# Altium PCB omnibothub-power-four.PcbDoc
Units mil, origin at the board's own origin, x right, y up, seen from the top; angles counter-clockwise.
Board outline 2530.03 x 2710.03 mil, 2 copper layers (Top Layer, Bottom Layer); 15 components, 6 nets, 36 pads, 4 vias.
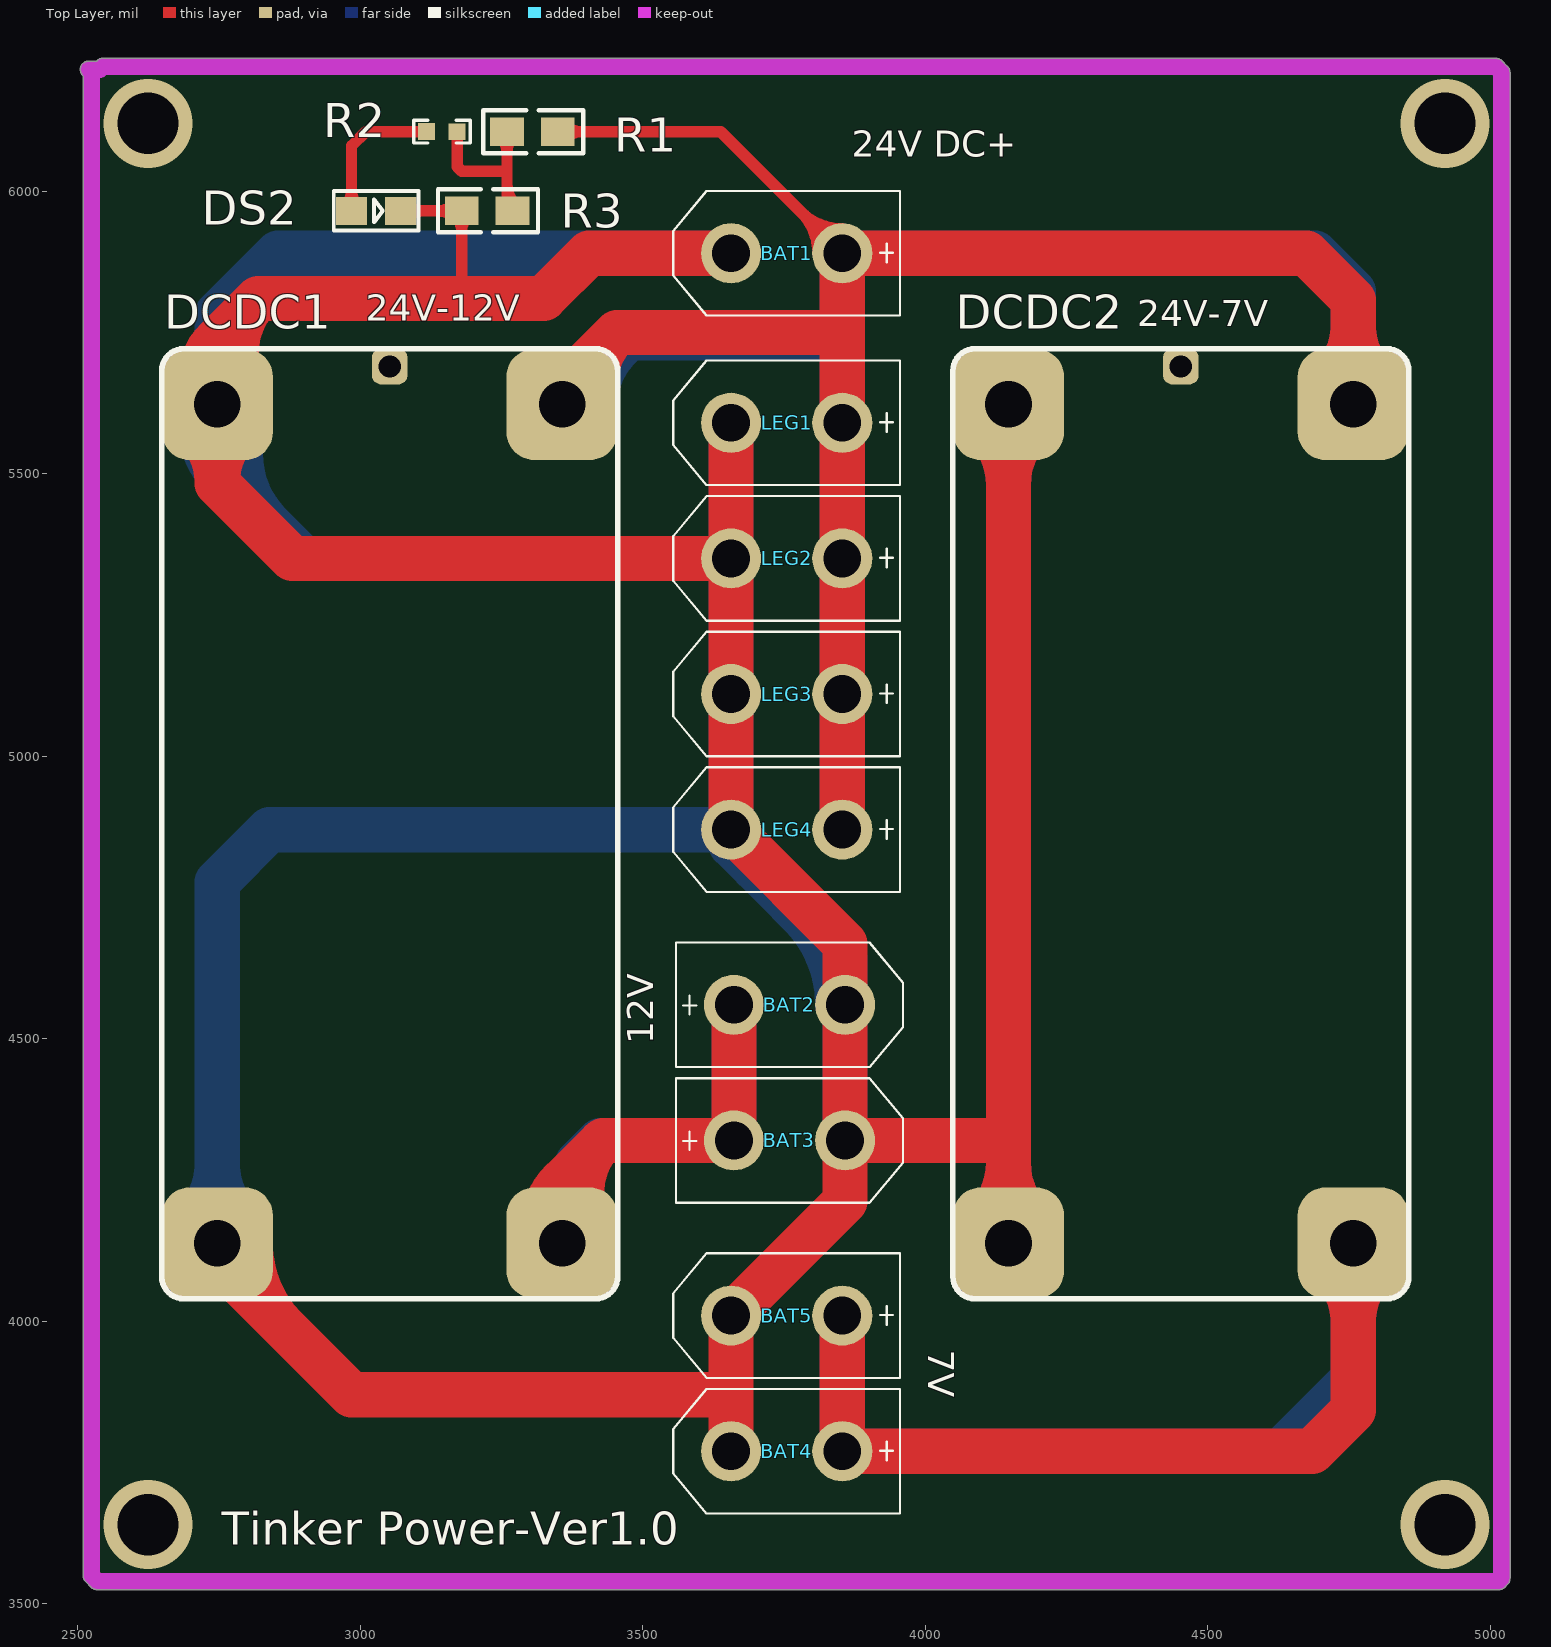
[diagram p0: Top Layer view]
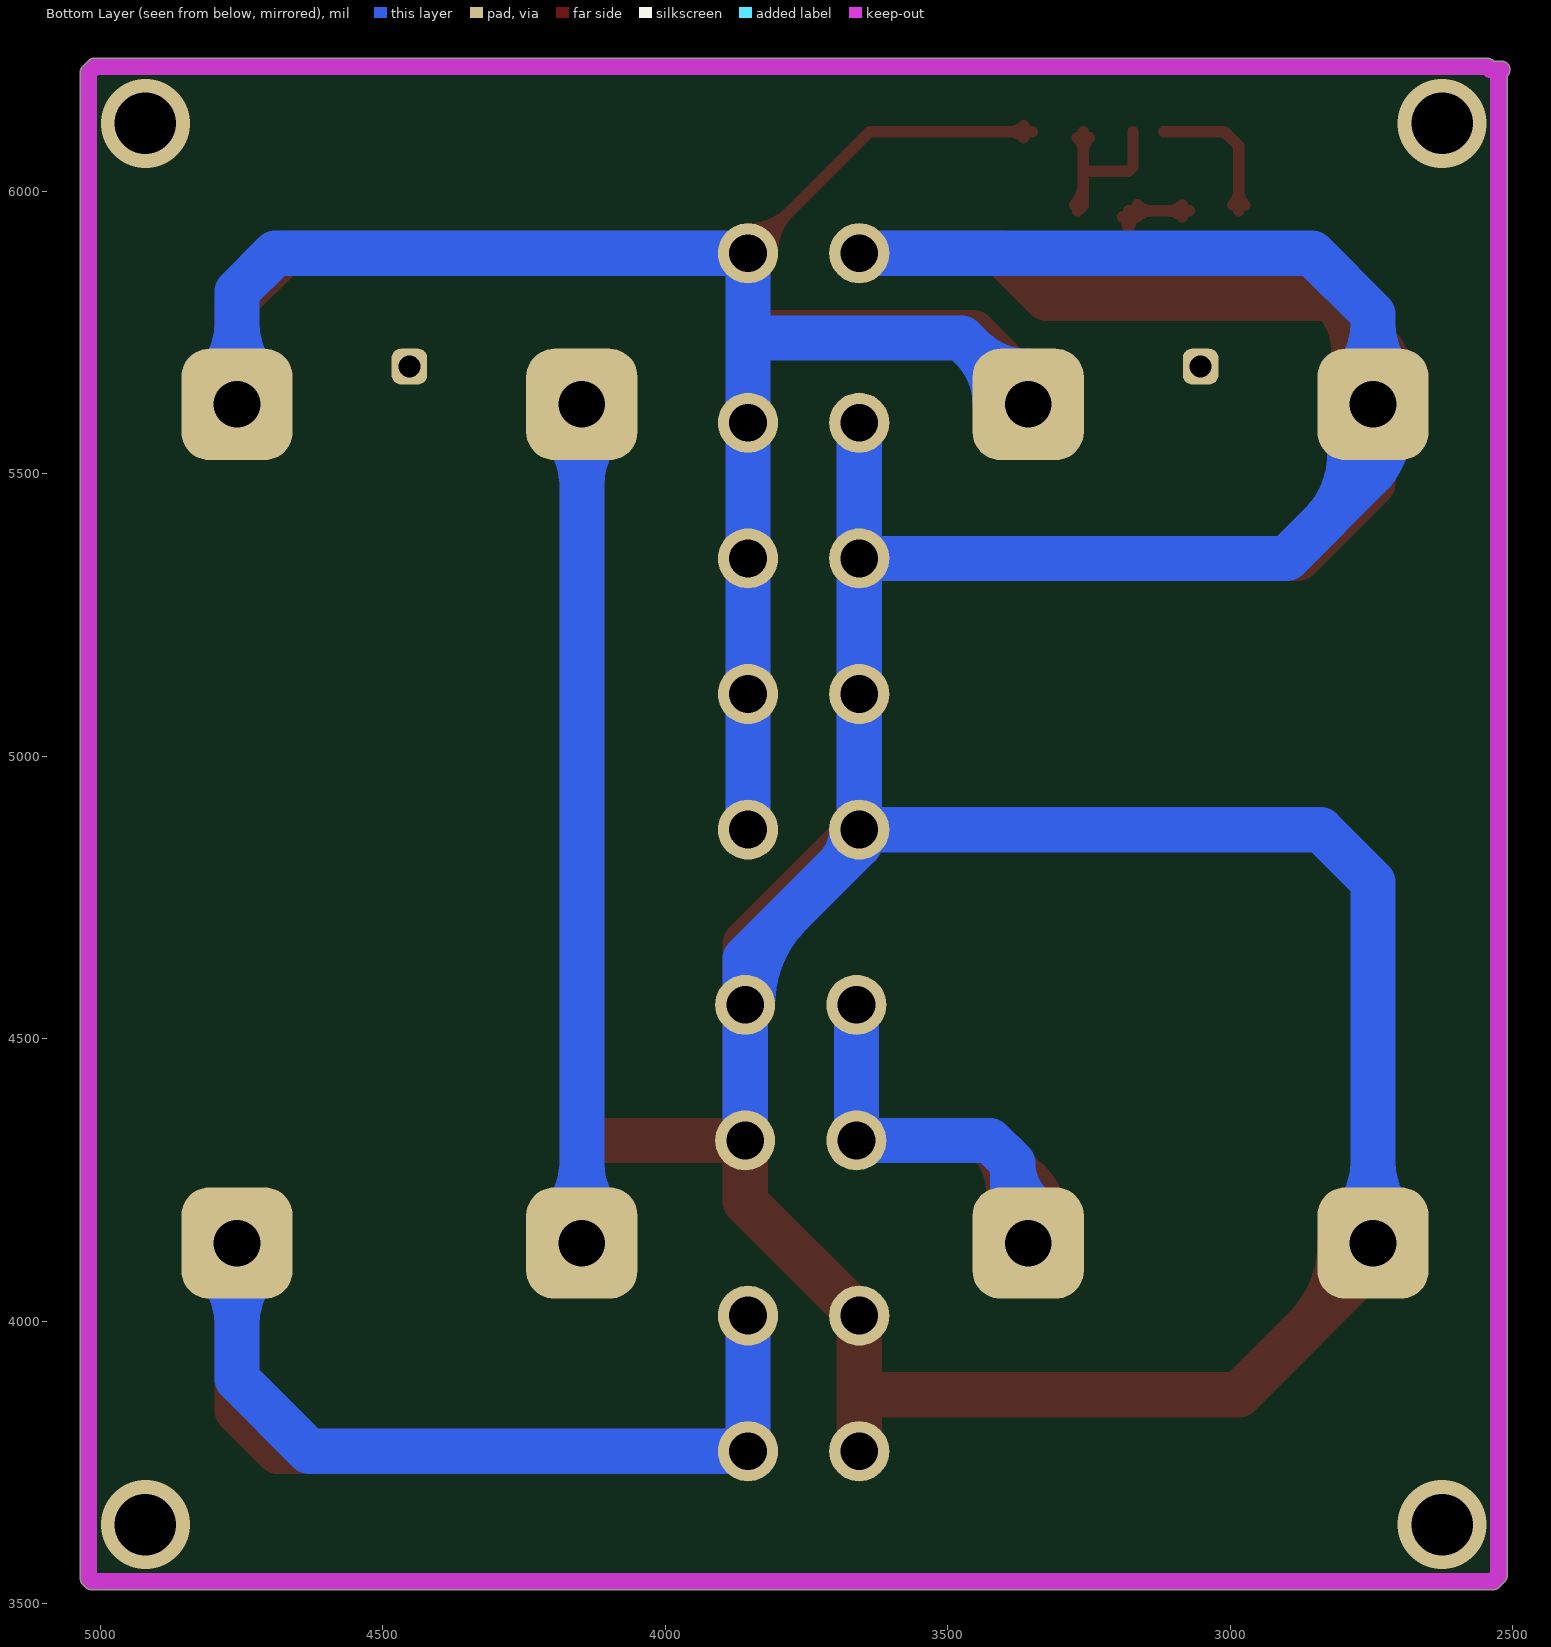
[diagram p1: Bottom Layer view, seen from below]
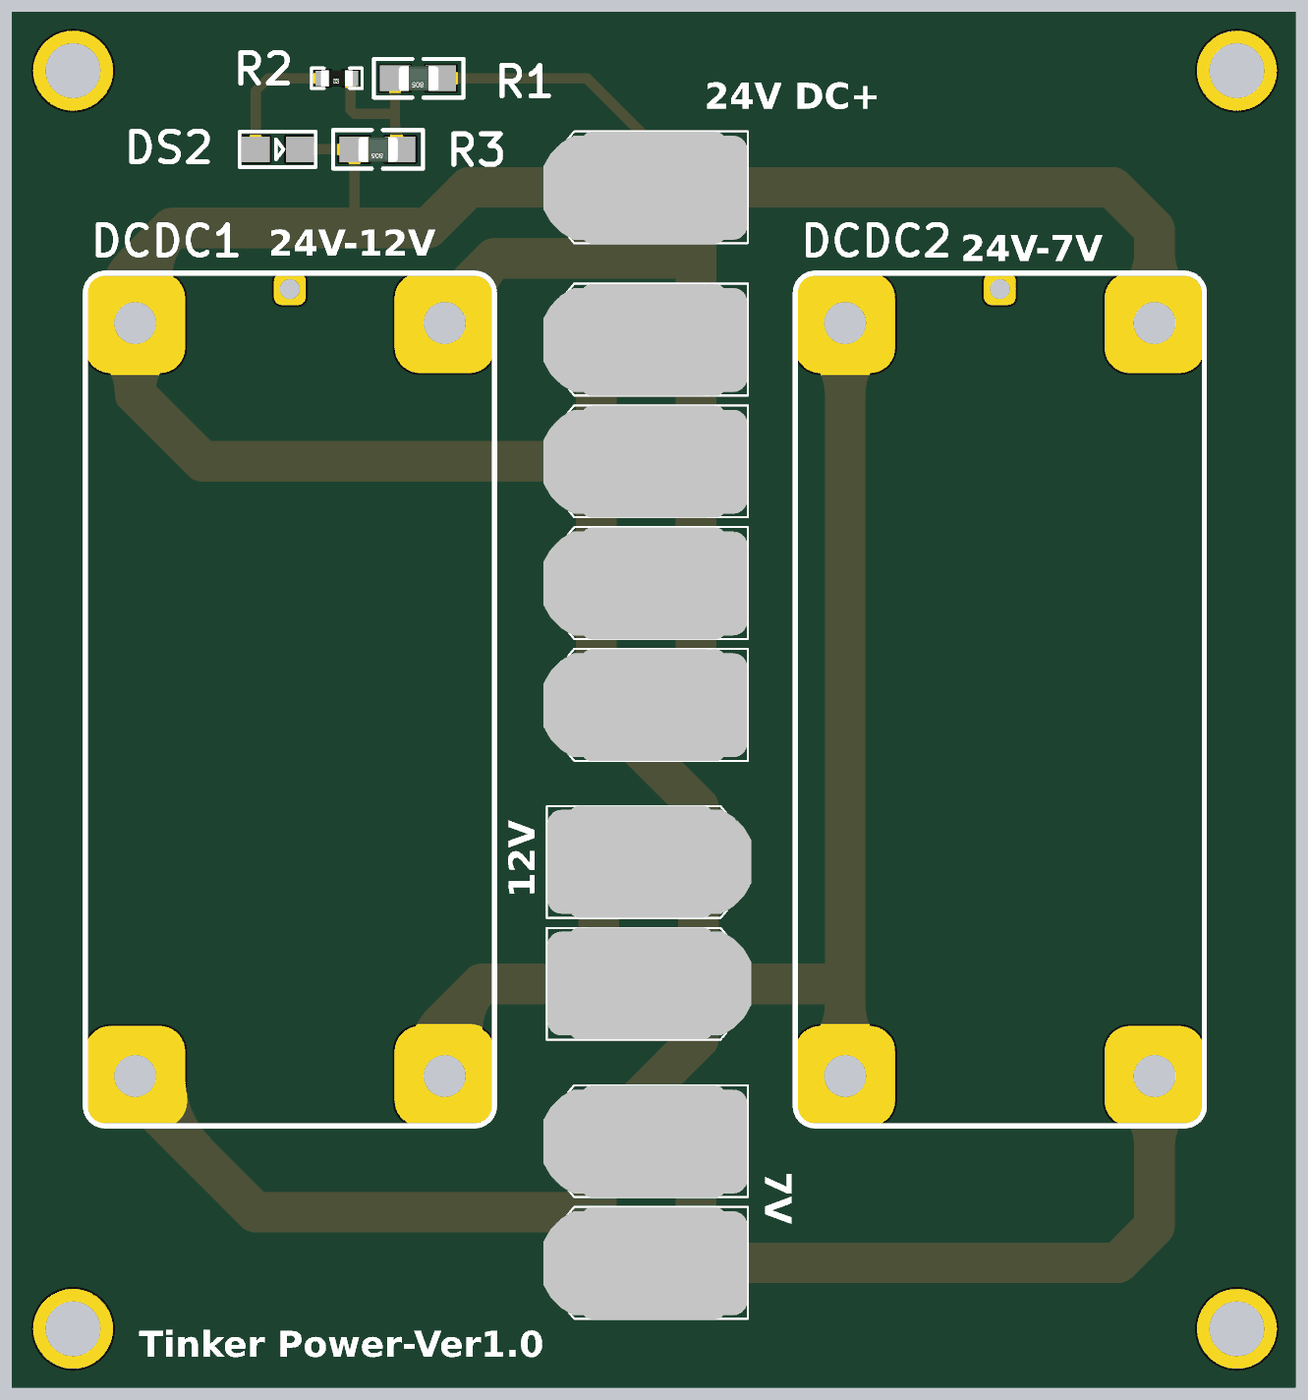
[diagram p2: 3D render of the assembled board from above, using the file's embedded part models]

## Layer stack, top to bottom
Top Layer: signal copper 1.4
Dielectric: dielectric 12.6, FR-4, Dk 4.8
Bottom Layer: signal copper 1.4

## Board outline
2514.4,3539.37 cw(c2525,3550) 2509.99,3550 2509.99,6203.81 cw(c2520,6215) 2520,6230.02 2533.78,6230.02 2534.38,6230.62 2534.37,6230.6 cw(c2545,6220) 2545,6235.02 5010,6235.02 cw(c5010,6220) 5020.63,6230.6 5020.62,6230.62 5030.62,6220.62 5030.6,6220.63 cw(c5020,6210) 5035.02,6210 5035.02,3545 cw(c5020,3545) 5030.6,3534.37 5030.62,3534.38 5025.62,3529.38 5025.63,3529.4 cw(c5015,3540) 5015,3524.99 2535,3524.99 cw(c2535,3540) 2524.37,3529.4 2524.38,3529.38

## Design rules (kind name [scope] priority, off if disabled: settings)
Clearance [All] p1: gap=10
PolygonConnect [All] p1: connectstyle=Relief reliefconductorwidth=10 reliefentries=4 polygonreliefangle="90 Angle"
RoutingVias [All] p1: holewidth=28 width=50 viastyle="Through Hole" minholewidth=28 minwidth=50 maxholewidth=28 maxwidth=50
SilkscreenOverComponentPads [All] p1: minsilkscreentomaskgap=10
SolderMaskExpansion [All] p1: expansion=4
Width [All] p1: maxlimit=80 minlimit=10 preferedwidth=10 minimp=50.000000 maximp=50.000000 favimp=50.000000
27 further rules are at their usual default settings.

## Components (designator, comment, footprint, x,y, rotation, side; value= is the part's Value field where it differs from the comment)
BAT1 "Header 2" XT30UPB 3755,5890 r180 top
BAT2 "Header 2" XT30UPB 3760,4560 r0 top
BAT3 "Header 2" XT30UPB 3760,4320 r0 top
BAT4 "Header 2" XT30UPB 3755,3770 r180 top
BAT5 "Header 2" XT30UPB 3755,4010 r180 top
DCDC1 "Header 2X2" DCDC5V 3360,5620 r270 top
DCDC2 "Header 2X2" DCDC5V 4760,5620 r270 top
DS2 "LED1" SMDLED 2985,5965 r0 top
LEG1 "Header 2" XT30UPB 3755,5590 r180 top
LEG2 "Header 2" XT30UPB 3755,5350 r180 top
LEG3 "Header 2" XT30UPB 3755,5110 r180 top
LEG4 "Header 2" XT30UPB 3755,4870 r180 top
R1 "100K" R0805 3305,6105 r180 top
R2 "560R" R0603 3145,6105 r180 top
R3 "10K" R0805 3225,5965 r180 top

## Footprints (in the part's own frame and the unit in brackets; to place one, negate y for a bottom-side part, rotate by r counter-clockwise, add the part's x,y. Pads: shape width x height; smd on the part's side, far side on the other; paste and mask are expansions set on the pad)
DCDC5V [mm]
  rrect50% 5x5 hole 2.1: 1(-0.065,-0.059) 2(37.635,-0.059) 3(-0.065,-15.559) 4(37.635,-15.559)
  rrect50% 1.6x1.6 hole 1: 2(-1.765,-7.809)
  silkscreen extent -2.57,-18.06 40.13,2.44
R0603 [mil]
  rect 30x30 smd: 1(-27,0) 2(27.5,-0.06)
  silkscreen extent -50,-20 50,20, body extent -31,-16 31,16, height 12
R0805 [mil]
  rect 60x50 smd: 1(45,0) 2(-45,0)
  silkscreen extent -90,-38 87,38, body extent -41,-24 38,25, height 31
SMDLED [mm]
  rect 1.4x1.27 smd: 1(0.001,-0.002) 2(2.211,-0.002)
  silkscreen extent -0.8,-0.89 3.01,0.89
XT30UPB [mm]
  round 2.7 hole 1.7: 1(-2.5,0) 2(2.5,0)
  silkscreen extent -5.1,-2.8 5.1,2.8, body extent -5.07,-2.78 5.13,2.82, height 10.7

## Part data
BAT1 BAT2 BAT3 BAT4 BAT5 LEG1 LEG2 LEG3 LEG4: "Header, 2-Pin"
DCDC1 DCDC2: "Header, 2-Pin, Dual row"
DS2: library part LED2, "Typical RED, GREEN, YELLOW, AMBER GaAs LED"
R1 R2 R3: library part Res2, "0603"

## Via types
v1: diameter 157.48, hole 108.27, Top Layer to Bottom Layer, 4 vias

## Nets (pads, with @x,y where several pads share a name; then routed paths per layer and width w, separated by ;. In a path a pad name is that pad's centre, name@x,y a point inside that pad or via, vN(x,y) a via of type N, cw(c..) or ccw(c..) an arc to the next point about the centre after c; other vN are vias at no path point)
7V: BAT4.1 BAT5.1 DCDC2.2@4757.66,4138.32 | length 3350.9
  Top Layer w80: BAT5.1 BAT4.1 4685,3770 4757.66,3842.66 DCDC2.2@4757.66,4138.32 ; DCDC2.2@4716.35,4097.01 cw(c4616.61,3997.27) 4757.66,3997.27 cw(c4898.71,3997.27) DCDC2.2@4798.97,4097.01
  Bottom Layer w80: BAT5.1 BAT4.1 4630,3770 4757.66,3897.66 DCDC2.2@4757.66,4138.32 ; DCDC2.2@4716.35,4097.01 cw(c4616.61,3997.27) 4757.66,3997.27 cw(c4898.71,3997.27) DCDC2.2@4798.97,4097.01
12V: BAT2.1 BAT3.1 DCDC1.2@3357.66,4138.32 | length 1916.5
  Top Layer w80: DCDC1.2@3325.19,4186.89 ccw(c3284.57,4247.66) 3357.66,4247.66 ; DCDC1.2@3338.82,4127.81 cw(c3424.61,4175.68) 3355.14,4245.14 ; DCDC1.2@3357.66,4138.32 3357.66,4247.66 ; DCDC1.2@3390.13,4186.89 cw(c3430.75,4247.66) 3357.66,4247.66 ; DCDC1.2@3408.68,4166.79 cw(c3520.7,4229.29) 3430,4320 ; BAT2.1 BAT3.1 3430,4320 ; 3357.66,4247.66 3430,4320
  Bottom Layer w80: DCDC1.2@3330.57,4190.09 ccw(c3283.53,4279.99) 3385,4279.99 ; DCDC1.2@3357.66,4138.32 3385,4165.66 3385,4280 ; BAT2.1 BAT3.1 3425,4320 3385,4280
GND: BAT1.2 BAT2.2 BAT3.2 BAT4.2 BAT5.2 DCDC1.3 DCDC1.4 DCDC2.3 DCDC2.4 DS2.2 LEG1.2 LEG2.2 LEG3.2 LEG4.2 R3.1 | length 17119.1
  Top Layer w20: DS2.2 3179.94,5964.94 R3.1 3180,5815 ; DS2.2@3085.21,5954.33 cw(c3110.81,5928.72) 3110.81,5964.94 cw(c3110.81,6001.15) DS2.2@3085.21,5975.54 ; 3138.63,5964.94 ccw(c3138.63,6001.37) R3.1@3164.39,5975.61 ; 3138.94,5964.94 cw(c3138.94,5928.94) R3.1@3164.39,5954.39 ; R3.1@3169.39,5954.39 cw(c3143.79,5928.79) 3180,5928.79 cw(c3216.21,5928.79) R3.1@3190.61,5954.39
  Top Layer w80: DCDC1.3@2706.33,5581.04 cw(c2608.92,5482.58) 2747.43,5482.58 cw(c2885.93,5482.58) DCDC1.3@2788.52,5581.04 ; DCDC1.3@2713.02,5669.8 ccw(c2663.77,5737.42) 2747.43,5737.42 ccw(c2831.09,5737.42) DCDC1.3@2781.83,5669.8 ; DCDC1.3@2728.64,5611.97 cw(c2818.41,5662.63) 2745.52,5735.52 ; DCDC1.4 2747.43,4107.57 2985,3870 3656.57,3870 ; DCDC1.3@2798.31,5651.29 cw(c2913.63,5716.37) 2820,5810 ; DCDC1.4@2805.85,4138.32 ccw(c3021.13,4138.32) 2868.91,3986.09 ; BAT4.2 3656.57,3870 ; LEG1.2 LEG2.2 ; BAT1.2 3405,5890 3325,5810 2820,5810 ; DCDC2.4@4106.11,4179.64 ccw(c4006.37,4279.37) 4147.43,4279.37 ccw(c4288.48,4279.37) DCDC2.4@4188.74,4179.64 ; DCDC2.3@4106.11,5581.26 cw(c4006.37,5481.52) 4147.43,5481.52 cw(c4288.48,5481.52) DCDC2.3@4188.74,5581.26 ; 4115,4320 BAT3.2 ; DCDC2.4 DCDC2.3 ; 2820,5810 2747.43,5737.43 DCDC1.3 2747.43,5482.57 2880,5350 LEG2.2 ; 3656.57,3870 BAT5.2 3858.43,4211.85 BAT3.2 ; LEG2.2 LEG3.2 LEG4.2 3858.43,4668.15 BAT2.2 BAT3.2
  Bottom Layer w80: DCDC1.4@2706.11,4179.64 ccw(c2606.37,4279.37) 2747.43,4279.37 ccw(c2888.48,4279.37) DCDC1.4@2788.74,4179.64 ; DCDC1.3@2706.11,5663.89 ccw(c2606.37,5763.63) 2747.43,5763.63 ccw(c2888.48,5763.63) DCDC1.3@2788.74,5663.89 ; DCDC1.3@2727.45,5630.72 ccw(c2843.17,5583.56) 2754.81,5495.19 ; DCDC1.4 2747.43,4777.43 2840,4870 LEG4.2 LEG3.2 LEG2.2 ; DCDC1.3@2801.53,5600.53 ccw(c2964.22,5534.23) 2839.99,5410.01 ; LEG4.2@3656.57,4843.43 3858.43,4641.57 BAT2.2 BAT3.2 ; LEG1.2 LEG2.2 ; BAT1.2 2855,5890 2747.43,5782.43 DCDC1.3 2747.43,5502.57 2900,5350 LEG2.2 ; LEG4.2@3669.72,4870 ccw(c3765.63,4870) 3697.81,4802.19 ; 3778.3,4721.7 cw(c3616.59,4560) BAT2.2@3845.28,4560 ; DCDC2.4@4106.11,4179.64 ccw(c4006.37,4279.37) 4147.43,4279.37 ccw(c4288.48,4279.37) DCDC2.4@4188.74,4179.64 ; DCDC2.3@4106.11,5581.26 cw(c4006.37,5481.52) 4147.43,5481.52 cw(c4288.48,5481.52) DCDC2.3@4188.74,5581.26 ; DCDC2.4 DCDC2.3 ; 2747.43,5502.58 cw(c2841.43,5502.58) 2783.46,5576.58 ccw(c2841.43,5502.58) 2747.43,5502.58 ; 2747.43,5502.58 ccw(c2653.42,5502.58) 2711.39,5576.58 cw(c2653.42,5502.58) 2747.43,5502.58
NetDS2_1: DS2.1 R2.2 | length 314.8
  Top Layer w20: DS2.1@2974.43,5975.54 ccw(c2948.82,6001.15) 2985.03,6001.15 ccw(c3021.25,6001.15) DS2.1@2995.64,5975.54 ; DS2.1 2985.03,6080.03 3010.06,6105.06 R2.2
NetR1_1: R1.1 R2.1 R3.2 | length 396.2
  Top Layer w20: R2.1 3172,6043 3180,6035 3260,6035 ; R1.1@3249.39,6094.39 cw(c3223.79,6068.79) 3260,6068.79 cw(c3296.21,6068.79) R1.1@3270.61,6094.39 ; 3260,6013.28 ccw(c3313.28,6013.28) R3.2@3275.61,5975.61 ; R1.1 3260,6035 ; R3.2 3260,5975 3260,6035
POWER: BAT1.1 DCDC1.1 DCDC2.1 LEG1.1 LEG2.1 LEG3.1 LEG4.1 R1.2 | length 7101.4
  Top Layer w20: R1.2 3638.43,6105 BAT1.1 ; R1.2@3365.61,6094.39 cw(c3391.21,6068.79) 3391.21,6105 cw(c3391.21,6141.21) R1.2@3365.61,6115.61 ; BAT1.1@3810.28,5890 ccw(c3706.1,5890) 3779.76,5963.66 ccw(c3853.43,6037.32) BAT1.1@3853.43,5933.15 ; BAT1.1@3830.28,5890 ccw(c3774.39,5890) 3813.91,5929.52 ccw(c3853.43,5969.04) BAT1.1@3853.43,5913.15
  Top Layer w80: DCDC1.1 3357.66,5652.66 3455,5750 ; DCDC1.1@3415.48,5630.98 cw(c3553.9,5651.09) 3454.99,5749.99 ; LEG4.1 LEG3.1 LEG2.1 LEG1.1 3853.43,5750 ; DCDC2.1@4716.35,5663.89 ccw(c4616.61,5763.63) 4757.66,5763.63 ccw(c4898.71,5763.63) DCDC2.1@4798.97,5663.89 ; DCDC2.1 4757.66,5807.34 4675,5890 BAT1.1 3853.43,5750 ; 3455,5750 3853.43,5750
  Bottom Layer w80: DCDC1.1 3475.09,5740 3853.43,5740 ; DCDC1.1@3357.66,5681 ccw(c3357.66,5822.05) 3457.4,5722.31 ccw(c3557.14,5622.57) DCDC1.1@3416.09,5622.57 ; LEG4.1 LEG3.1 LEG2.1 LEG1.1 3853.43,5740 ; DCDC2.1@4716.35,5663.89 ccw(c4616.61,5763.63) 4757.66,5763.63 ccw(c4898.71,5763.63) DCDC2.1@4798.97,5663.89 ; DCDC2.1 4757.66,5822.34 4690,5890 BAT1.1 3853.43,5740
pads on no net: DCDC1.2@3052.54,5689.5 DCDC2.2@4452.54,5689.5
copper on no net:
  other v1: 2625,3640 4920,3640 2625,6120 4920,6120

## Keep-outs
Keep-Out Layer:
  lines w30: 2520,6215 2540,6215 2545,6220 5010,6220 5020,6210 5020,3545 5015,3540 2535,3540 2525,3550 2525,6210

## Silkscreen, mask and mechanical layers (free items; w line width, h text height)
Top Overlay:
  text "24V DC+" at 3870,6045 h80
  text "24V-12V" at 3010,5755 h80
  text "24V-7V" at 4375,5745 h80
  text "12V" at 3535,4490 h80 r90
  text "7V" at 3990,3950 h80 r270
  text "Tinker Power-Ver1.0" at 2755,3585 h100